# EAGLE board HECTOR-WATCH v31 (EAGLE 9.7.0)
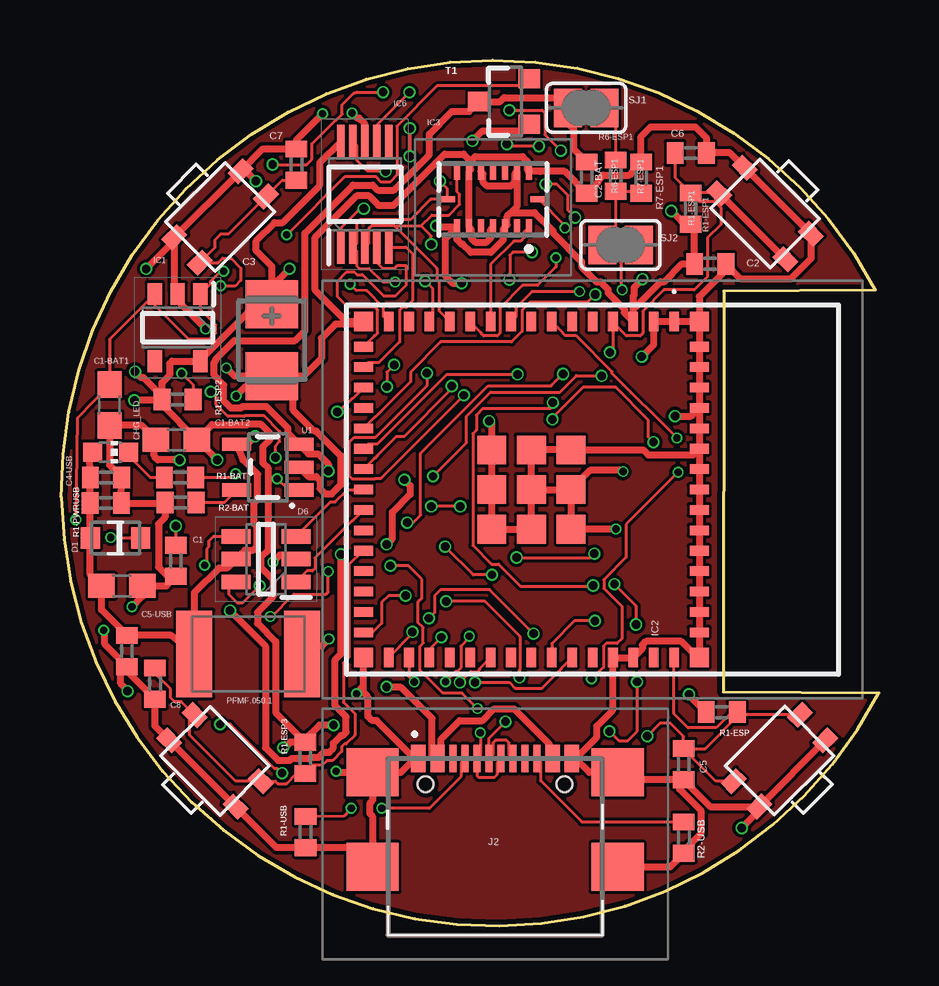
[diagram p0: board, top side]
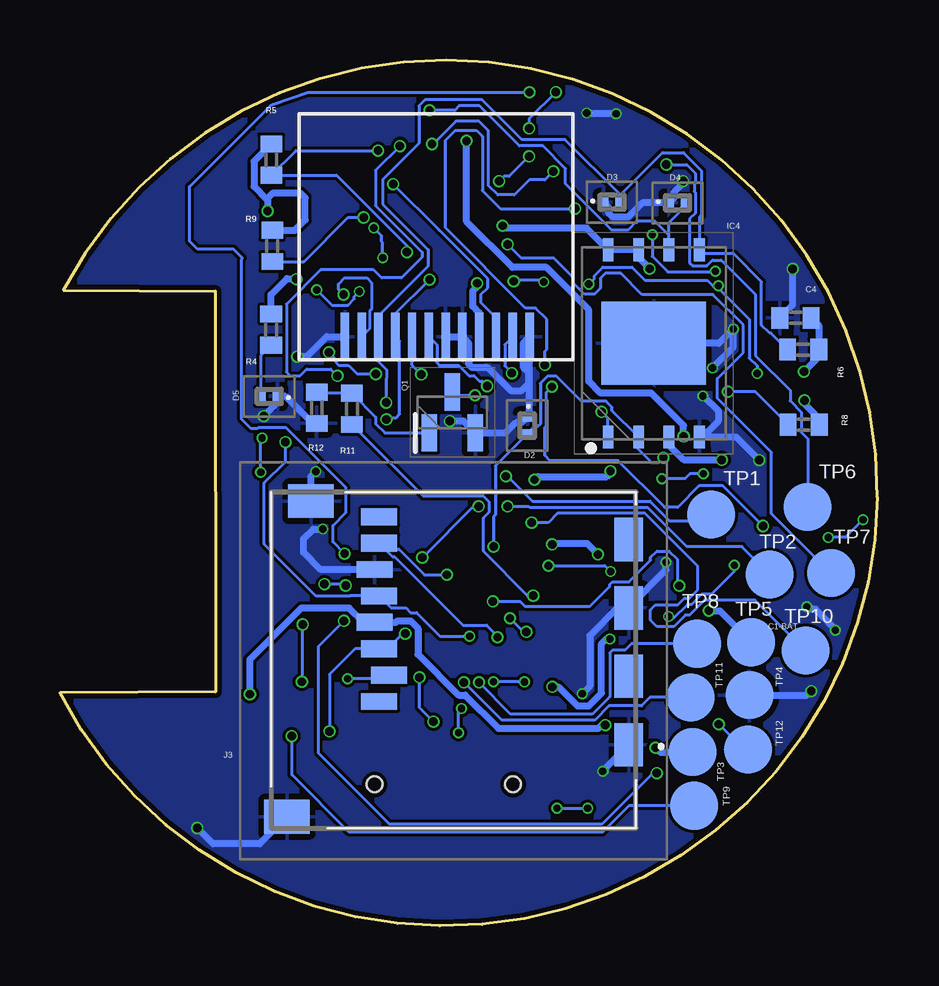
[diagram p1: board, bottom side, seen from below]

Size 34.08 x 36.08 mm. Coordinates in mm from the lower left corner, seen from the top.
Outline: 0,17.87 arc152 34.08,9.71 27.59,9.76 27.61,26.46 33.94,26.5 arc153 0,17.87
Copper layers (1*16): Top / Bottom
Stack-up Default Layer Stack: Top User Defined 0.035mm / Dielectric-1 User Defined 1.6mm / Bottom User Defined 0.035mm
Design rules: minimum copper width 5mil, minimum drill size 0.3mm, copper clearance wire_polygon to wire_polygon 5mil, copper clearance wire_polygon to pad_smd 5mil, copper clearance wire_polygon to via 5mil, copper clearance pad_smd to pad_smd 5mil, copper clearance pad_smd to via 5mil, copper clearance via to via 5mil, copper clearance smd to pad (same net) 5mil, copper clearance smd to via (same net) 5mil, copper clearance smd to smd (same net) 5mil, dimension clearance 0.2mm, restrict clearance 0mil, drill distance 6mil, keepout clearance 0mil

## Footprints (pad centres in the part's own frame; a part is rotated, then mirrored left to right if it is on the bottom)
EAGLE-LTSPICE_C0402 = smd 0.7 x 0.9: 1 -0.65,0; 2 0.65,0
RCL_C0603 = smd 1.1 x 1: 1 -0.85,0; 2 0.85,0
CT3528 = smd 2 x 2.2: + -1.5,0; - 1.5,0
ADAFRUIT_CHIP-LED0603 = smd 0.8 x 0.8: A 0,-0.75; C 0,0.75
AVX---SD0805S020S1R0_AVX_SD0805S020S1R0_0 = smd 0.8 x 0.9: 1 -1.05,0; 2 1.05,0
PESD5V0S1BL315 = smd 0.4 x 0.7: 1 -0.35,0; 2 0.35,0
SOT95P280X145-6N = smd 1.2 x 0.6: 1 -1.25,0.95; 2 -1.25,0; 3 -1.25,-0.95; 4 1.25,-0.95; 5 1.25,0; 6 1.25,0.95
SOT95P280X120-5N = smd 0.9 x 0.6: 1 -1.4,0.95; 2 -1.4,0; 3 -1.4,-0.95; 4 1.4,-0.95; 5 1.4,0.95
ESP32S3MINI1N8 = smd 0.8 x 0.4: 1 -7,5.95; 2 -7,5.1; 3 -7,4.25; 4 -7,3.4; 5 -7,2.55; 6 -7,1.7; 7 -7,0.85; 8 -7,0; 9 -7,-0.85; 10 -7,-1.7; 11 -7,-2.55; 12 -7,-3.4; 13 -7,-4.25; 14 -7,-5.1; 15 -7,-5.95; 31 7,-5.95; 32 7,-5.1; 33 7,-4.25; 34 7,-3.4; 35 7,-2.55; 36 7,-1.7; 37 7,-0.85; 38 7,0; 39 7,0.85; 40 7,1.7; 41 7,2.55; 42 7,3.4; 43 7,4.25; 44 7,5.1; 45 7,5.95 | smd 0.4 x 0.8: 16 -5.95,-7; 17 -5.1,-7; 18 -4.25,-7; 19 -3.4,-7; 20 -2.55,-7; 21 -1.7,-7; 22 -0.85,-7; 23 0,-7; 24 0.85,-7; 25 1.7,-7; 26 2.55,-7; 27 3.4,-7; 28 4.25,-7; 29 5.1,-7; 30 5.95,-7; 46 5.95,7; 47 5.1,7; 48 4.25,7; 49 3.4,7; 50 2.55,7; 51 1.7,7; 52 0.85,7; 53 0,7; 54 -0.85,7; 55 -1.7,7; 56 -2.55,7; 57 -3.4,7; 58 -4.25,7; 59 -5.1,7; 60 -5.95,7 | smd 1.2 x 1.2: 61 0,0; 66 -1.65,1.65; 67 -1.65,0; 68 -1.65,-1.65; 69 0,-1.65; 70 1.65,-1.65; 71 1.65,0; 72 1.65,1.65; 73 0,1.65 | smd 0.8 x 0.8: 62 -7,7; 63 -7,-7; 64 7,-7; 65 7,7
BMI085 = smd 0.675 x 0.25: 1 1.165,1.5; 2 1.165,1; 3 1.165,0.5; 4 1.165,0; 5 1.165,-0.5; 6 1.165,-1; 7 1.165,-1.5; 9 -1.165,-1.5; 10 -1.165,-1; 11 -1.165,-0.5; 12 -1.165,0; 13 -1.165,0.5; 14 -1.165,1; 15 -1.165,1.5 | smd 0.25 x 0.675: 8 0,-1.915; 16 0,1.915
SON127P800X600X80-9N = smd 0.95 x 0.45: 1 -3.9,1.905; 2 -3.9,0.635; 3 -3.9,-0.635; 4 -3.9,-1.905; 5 3.9,-1.905; 6 3.9,-0.635; 7 3.9,0.635; 8 3.9,1.905 | smd 3.45 x 4.35: 9 0,0
SOP50P490X110-10N = smd 1.4 x 0.3: 1 -2.2,1; 2 -2.2,0.5; 3 -2.2,0; 4 -2.2,-0.5; 5 -2.2,-1; 6 2.2,-1; 7 2.2,-0.5; 8 2.2,0; 9 2.2,0.5; 10 2.2,1
USB4110GFA = smd 0.3 x 1.15: A1 -3.35,3.678; A4 -2.55,3.678; A5 -1.25,3.678; A6 -0.25,3.678; A7 0.25,3.678; A8 1.25,3.678; A9 2.55,3.678; A12 3.35,3.678; B1 3.05,3.678; B4 2.25,3.678; B5 1.75,3.678; B6 0.75,3.678; B7 -0.75,3.678; B8 -1.75,3.678; B9 -2.25,3.678; B12 -3.05,3.678 | smd 2.18 x 2: MP1 -5.11,-0.827; MP2 5.11,-0.827; MP3 -5.11,3.103; MP4 5.11,3.103 | hole 0.65: -2.89,2.603; 2.89,2.603
112ATAARR03ATTEND = smd 1.8 x 1.2: G1 10.6,10.4; G2 4.9,10.4; S1 7.75,10.4; S2 2.05,10.4 | smd 1.4 x 1.9: G3 13.6,-3.85; G4 0.45,-2.85 | smd 0.7 x 1.5: P1 8.8,0; P2 7.7,0.4; P3 6.6,0; P4 5.5,-0.2; P5 4.4,0; P6 3.3,-0.2; P7 2.2,0; P8 1.1,0
VARISTOR_CT/CN1812 = smd 1.5 x 3.6: 1 -2.25,0; 2 2.25,0
SOT96P240X120-3N = smd 1.55 x 0.65: 1 -0.85,0.96; 2 -0.85,-0.96; 3 0.85,0
EAGLE-LTSPICE_R0402 = smd 0.7 x 0.9: 1 -0.65,0; 2 0.65,0
SJ = smd 1.168 x 1.6: 1 -0.762,0; 2 0.762,0
SPARKFUN-DISCRETESEMI_SOT23-3 = smd 0.8 x 0.9: 1 -0.95,-1; 2 0.95,-1; 3 0,1.1
TP20R = smd 2 x 2: TP 0,0
SPARKFUN-IC-POWER_SOT23-5 = smd 0.55 x 1.2: 1 -0.95,-1.3; 2 0,-1.3; 3 0.95,-1.3; 4 0.95,1.3; 5 -0.95,1.3
HECTOR-WATCH-BUTTON-FP = smd 0.9 x 0.635: 1 -1.95,0.75; 1' 1.95,0.75; 2 -1.95,-0.75; 2' 1.95,-0.75
HECTOR-WATCH-LCD-FP = smd 0.35 x 2: 1 3.9,-4.3; 2 3.2,-4.3; 3 2.5,-4.3; 4 1.8,-4.3; 5 1.1,-4.3; 6 0.4,-4.3; 7 -0.3,-4.3; 8 -1,-4.3; 9 -1.7,-4.3; 10 -2.4,-4.3; 11 -3.1,-4.3; 12 -3.8,-4.3

## Placement (x,y rotation side)
C1  1uF  [EAGLE-LTSPICE_C0402]  4.77,15.22 90 top
C1-BAT  4.7uF  [EAGLE-LTSPICE_C0402]  2.73,11.46 270 top
C1-BAT1  4.7uF  [RCL_C0603]  2,21.71 270 top
C1-BAT2  4.7uF  [RCL_C0603]  4.8,20.26 180 top
C2  1uF  [EAGLE-LTSPICE_C0402]  27.04,27.59 180 top
C2-BAT  4.7uF  [EAGLE-LTSPICE_C0402]  21.9,31.19 270 top
C3  100uF  [CT3528]  8.78,24.41 270 top
C4  100nF  [EAGLE-LTSPICE_C0402]  3.42,25.34 180 bottom
C4-USB  100nF  [EAGLE-LTSPICE_C0402]  1.86,18.69 0 top
C5  1uF  [EAGLE-LTSPICE_C0402]  25.94,6.74 270 top
C5-USB  4.7uF  [RCL_C0603]  2.52,14.17 0 top
C6  100nF  [EAGLE-LTSPICE_C0402]  26.24,32.21 0 top
C7  100nF  [EAGLE-LTSPICE_C0402]  9.8,31.73 90 top
C8  100nF  [EAGLE-LTSPICE_C0402]  3.91,10.1 270 top
CHG_LED  [ADAFRUIT_CHIP-LED0603]  2.05,19.74 270 top
D1  AVX---SD0805S020S1R0_AVX_SD0805S020S1R0AVX_SD0805S020S1R0_0_0  [AVX---SD0805S020S1R0_AVX_SD0805S020S1R0_0]  2.26,16.17 180 top
D2  PESD3V3S1BLYL  [PESD5V0S1BL315]  14.6,20.85 270 bottom
D3  PESD3V3S1BLYL  [PESD5V0S1BL315]  11.07,30.16 0 bottom
D4  PESD3V3S1BLYL  [PESD5V0S1BL315]  8.34,30.13 0 bottom
D5  PESD3V3S1BLYL  [PESD5V0S1BL315]  25.36,22.06 180 bottom
D6  USBLC6-2SC6Y  [SOT95P280X145-6N]  8.53,15.28 180 top
IC1  XC6220A331MR-G  [SOT95P280X120-5N]  4.85,24.93 270 top
IC2  ESP32-S3-MINI-1-N8  [ESP32S3MINI1N8]  19.59,18.18 270 top
IC3  BMI085  [BMI085]  17.99,30.27 270 top
IC4  W25Q256JVEIQ  [SON127P800X600X80-9N]  9.32,24.28 90 bottom
IC6  DRV2605LDGST  [SOP50P490X110-10N]  12.65,30.48 90 top
J2  USB4110-GF-A  [USB4110GFA]  18.08,3.29 0 top
J3  112A-TAAR-R03_ATTEND  [112ATAARR03ATTEND]  20.77,18.15 270 bottom
PFMF.050.1  500mA  [VARISTOR_CT/CN1812]  7.79,11.34 180 top
Q1  2N7002  [SOT96P240X120-3N]  17.72,21.4 90 bottom
R1-BAT  200  [EAGLE-LTSPICE_R0402]  4.95,18.69 0 top
R1-ESP  10K  [EAGLE-LTSPICE_R0402]  27.52,8.91 180 top
R1-ESP1  10K  [EAGLE-LTSPICE_R0402]  26.23,29.89 270 top
R1-ESP2  10K  [EAGLE-LTSPICE_R0402]  4.84,21.93 180 top
R1-ESP3  10K  [EAGLE-LTSPICE_R0402]  10.16,7.01 90 top
R1-PWRUSB  100K  [EAGLE-LTSPICE_R0402]  1.85,17.62 180 top
R1-USB  5K1  [EAGLE-LTSPICE_R0402]  10.18,3.91 90 top
R2-BAT  2K  [EAGLE-LTSPICE_R0402]  4.97,17.65 0 top
R2-USB  5K1  [EAGLE-LTSPICE_R0402]  25.94,3.68 270 top
R4  10K  [EAGLE-LTSPICE_R0402]  25.28,24.85 270 bottom
R5  10K  [EAGLE-LTSPICE_R0402]  25.27,31.93 270 bottom
R6  10K  [EAGLE-LTSPICE_R0402]  3.1,24.01 180 bottom
R6-ESP1  100K  [EAGLE-LTSPICE_R0402]  23.1,31.27 270 top
R7-ESP1  100K  [EAGLE-LTSPICE_R0402]  24.16,31.18 90 top
R8  10K  [EAGLE-LTSPICE_R0402]  3.07,20.89 180 bottom
R9  22  [EAGLE-LTSPICE_R0402]  25.23,28.33 270 bottom
R11  10K  [EAGLE-LTSPICE_R0402]  21.91,21.54 270 bottom
R12  10K  [EAGLE-LTSPICE_R0402]  23.38,21.59 90 bottom
SJ1  [SJ]  21.87,34.09 180 top
SJ2  [SJ]  23.31,28.38 180 top
T1  4.2A/20V/52mΩ/1.4W  [SPARKFUN-DISCRETESEMI_SOT23-3]  18.51,34.35 90 top
TP1  TPTP20R  [TP20R]  6.94,17.15 0 bottom
TP2  TPTP20R  [TP20R]  4.49,14.64 0 bottom
TP3  TPTP20R  [TP20R]  7.71,7.24 0 bottom
TP4  TPTP20R  [TP20R]  5.34,9.62 0 bottom
TP5  TPTP20R  [TP20R]  5.26,11.82 0 bottom
TP6  TPTP20R  [TP20R]  2.91,17.47 0 bottom
TP7  TPTP20R  [TP20R]  1.94,14.7 0 bottom
TP8  TPTP20R  [TP20R]  7.52,11.76 0 bottom
TP9  TPTP20R  [TP20R]  7.65,5.01 0 bottom
TP10  TPTP20R  [TP20R]  3,11.47 270 bottom
TP11  TPTP20R  [TP20R]  7.78,9.52 0 bottom
TP12  TPTP20R  [TP20R]  5.4,7.35 0 bottom
U1  SPARKFUN-IC-POWER_MCP73831  [SPARKFUN-IC-POWER_SOT23-5]  8.6,19.12 90 top
U$1  HECTOR-WATCH-BUTTON  [HECTOR-WATCH-BUTTON-FP]  6.61,29.55 225 top
U$2  HECTOR-WATCH-BUTTON  [HECTOR-WATCH-BUTTON-FP]  6.41,6.88 315 top
U$3  HECTOR-WATCH-BUTTON  [HECTOR-WATCH-BUTTON-FP]  29.94,6.89 45 top
U$4  HECTOR-WATCH-BUTTON  [HECTOR-WATCH-BUTTON-FP]  29.33,29.69 135 top
U$5  HECTOR-WATCH-LCD  [HECTOR-WATCH-LCD-FP]  18.4,28.85 0 bottom

## Library data of the parts
C1 C1-BAT C2 C2-BAT C4 C4-USB C5-C8 = Hector_Watch; SPICEMODEL: NONE; SPICEPREFIX: C
C1-BAT1 C1-BAT2 C3 C5-USB = Hector_Watch; SPICEPREFIX: C
CHG_LED PFMF.050.1 SJ1 SJ2 TP1-TP12 = Hector_Watch
D1 = Hector_Watch; CENTROID_NOT_SPECIFIED: No; DATASHEET: http://datasheets.avx.com/schottky.pdf; DIGIKEY_DESCRIPTION: DIODE SCHOTTKY 20V 1A 0805; DIGIKEY_PART_NUMBER: 478-7800-1-ND; LEAD_FREE: yes; MF: AVX; MOUSER_PART_NUMBER: 581-SD0805S020S1R0; MPN: SD0805S020S1R0; PACKAGE: 0805 (2012 metric); PREFIX: D; ROHS: yes; TEMPERATURE_RANGE_HIGH: +125°C; TEMPERATURE_RANGE_LOW: -55°C
D2-D5 = Hector_Watch; ARROW_PART_NUMBER: PESD3V3S1BLYL; ARROW_PRICE-STOCK: https://www.arrow.com/en/products/pesd3v3s1blyl/nexperia?region=nac; DESCRIPTION: PESD3V3S1BL - Low capacitance bidirectional ESD protection diode; HEIGHT: 0mm; MANUFACTURER_NAME: Nexperia; MANUFACTURER_PART_NUMBER: PESD3V3S1BLYL; MOUSER_PART_NUMBER: 771-PESD3V3S1BLYL; MOUSER_PRICE-STOCK: https://www.mouser.co.uk/ProductDetail/Nexperia/PESD3V3S1BLYL?qs=vLWxofP3U2zWoKHYJMVoKQ%3D%3D
D6 = Hector_Watch; ARROW_PART_NUMBER: USBLC6-2SC6Y; ARROW_PRICE-STOCK: https://www.arrow.com/en/products/usblc6-2sc6y/stmicroelectronics?region=nac; DESCRIPTION: Low Cap. ESD Protection Auto SOT-23-6 STMicroelectronics USBLC6-2SC6Y, Dual Uni-Directional TVS Diode Array, 6-Pin SOT-23; HEIGHT: 1.45mm; MANUFACTURER_NAME: STMicroelectronics; MANUFACTURER_PART_NUMBER: USBLC6-2SC6Y; MOUSER_PART_NUMBER: 511-USBLC6-2SC6Y; MOUSER_PRICE-STOCK: https://www.mouser.co.uk/ProductDetail/STMicroelectronics/USBLC6-2SC6Y?qs=gNDSiZmRJS%2FOgDexvXkdow%3D%3D
IC1 = Hector_Watch; DESCRIPTION: LDO Voltage Regulators; HEIGHT: 1.2mm; MANUFACTURER_NAME: Torex; MANUFACTURER_PART_NUMBER: XC6220A331MR-G; MOUSER_PART_NUMBER: 865-XC6220A331MR-G; MOUSER_PRICE-STOCK: https://www.mouser.co.uk/ProductDetail/Torex-Semiconductor/XC6220A331MR-G?qs=AsjdqWjXhJ8ZSWznL1J0gg%3D%3D
IC2 = Hector_Watch; DESCRIPTION: WiFi Development Tools - 802.11 [Engineering Samples] SMD Module, ESP32-S3FN8, 8 MB SPI Flash, PCB Antenna; HEIGHT: 2.55mm; MANUFACTURER_NAME: Espressif Systems; MANUFACTURER_PART_NUMBER: ESP32-S3-MINI-1-N8; MOUSER_PART_NUMBER: 356-ESP32-S3-MINI1N8; MOUSER_PRICE-STOCK: https://www.mouser.co.uk/ProductDetail/Espressif-Systems/ESP32-S3-MINI-1-N8?qs=XAiT9M5g4x82rl6F%2FIYUQg%3D%3D
IC3 = Hector_Watch; ARROW_PART_NUMBER: BMI085; ARROW_PRICE-STOCK: https://www.arrow.com/en/products/bmi085/bosch; DESCRIPTION: IMUs - Inertial Measurement Units High-performance IMU BMI085 for virtual and augmented reality applications; HEIGHT: 1mm; MANUFACTURER_NAME: BOSCH; MANUFACTURER_PART_NUMBER: BMI085; MOUSER_PART_NUMBER: 262-BMI085; MOUSER_PRICE-STOCK: https://www.mouser.co.uk/ProductDetail/Bosch-Sensortec/BMI085?qs=y6ZabgHbY%252ByGCM8LfWZyqA%3D%3D
IC4 = Hector_Watch; ARROW_PART_NUMBER: W25Q256JVEIQ; ARROW_PRICE-STOCK: https://www.arrow.com/en/products/w25q256jveiq/winbond-electronics?region=nac; DESCRIPTION: 256M-bit Serial Flash Memory with uniform 4KB sectors and Dual/Quad SPI; HEIGHT: 0.8mm; MANUFACTURER_NAME: Winbond; MANUFACTURER_PART_NUMBER: W25Q256JVEIQ; MOUSER_PART_NUMBER: 454-W25Q256JVEIQ; MOUSER_PRICE-STOCK: https://www.mouser.co.uk/ProductDetail/Winbond/W25Q256JVEIQ?qs=qSfuJ%252Bfl%2Fd4o%2FNFUf7yCgA%3D%3D
IC6 = Hector_Watch; ARROW_PART_NUMBER: DRV2605LDGST; ARROW_PRICE-STOCK: https://www.arrow.com/en/products/drv2605ldgst/texas-instruments?region=nac; DESCRIPTION: ERM & LRA Device Haptic Driver 2-5V BGA9 Texas Instruments DRV2605LDGST Piezo Haptic Motor Driver IC, 5 V, 10-Pin VSSOP; HEIGHT: 1.1mm; MANUFACTURER_NAME: Texas Instruments; MANUFACTURER_PART_NUMBER: DRV2605LDGST; MOUSER_PART_NUMBER: 595-DRV2605LDGST; MOUSER_PRICE-STOCK: https://www.mouser.co.uk/ProductDetail/Texas-Instruments/DRV2605LDGST?qs=asCBFxFfL1TjvcNdZsR2BA%3D%3D
J2 = Hector_Watch; DESCRIPTION: CONN USB 2.0 TYPE-C R/A SMT; HEIGHT: 3.26mm; MANUFACTURER_NAME: GCT (GLOBAL CONNECTOR TECHNOLOGY); MANUFACTURER_PART_NUMBER: USB4110-GF-A; MOUSER_PART_NUMBER: 640-USB4110-GF-A; MOUSER_PRICE-STOCK: https://www.mouser.co.uk/ProductDetail/GCT/USB4110-GF-A?qs=KUoIvG%2F9IlYiZvIXQjyJeA%3D%3D
J3 = Hector_Watch; DESCRIPTION: Micro SD Card Socket, Push-Push Type, Top Mount, SMT, H=1.83mm, 10u; HEIGHT: 1.9mm; MANUFACTURER_NAME: ATTEND; MANUFACTURER_PART_NUMBER: 112A-TAAR-R03 ATTEND
Q1 = Hector_Watch; ARROW_PART_NUMBER: 2N7002; ARROW_PRICE-STOCK: https://www.arrow.com/en/products/2n7002/on-semiconductor?region=europe; DESCRIPTION: N-channel MOSFET,2N7002 0.115A 60V; HEIGHT: 1.2mm; MANUFACTURER_NAME: onsemi; MANUFACTURER_PART_NUMBER: 2N7002; MOUSER_PART_NUMBER: 512-2N7002; MOUSER_PRICE-STOCK: https://www.mouser.co.uk/ProductDetail/onsemi-Fairchild/2N7002?qs=0dwsXDNhqlz66WJJhrTFjQ%3D%3D
R1-BAT R1-ESP R1-ESP1-R1-ESP3 R1-PWRUSB R1-USB R2-BAT R2-USB R4-R6 R6-ESP1 R7-ESP1 R8 R9 R11 R12 = Hector_Watch; SPICEMODEL: NONE; SPICEPREFIX: R
T1 = Hector_Watch; PROD_ID: TRANS-14715
U1 = Hector_Watch; PROD_ID: IC-09995
U$1-U$5 = HECTOR-WATCH-EXTRAS

## Nets
3V3: C1-BAT2.1 C2.2 C3.+ C4.1 IC1.5 IC2.3 IC3.3 IC3.7 IC3.11 IC3.14 IC4.3 IC4.7 IC4.8 IC6.10 J3.P4 R1-ESP1.2 R1-ESP2.2 R1-ESP3.2 R1-ESP.2 R4.1 R5.1 R6.1 R8.1 R9.1 TP3.TP U$5.4
ADC_BAT: IC2.9 SJ2.1
BOOT: C6.1 IC2.4 R1-ESP1.1 TP10.TP U$4.1 U$4.1'
BUTTON1: C7.1 IC2.15 R1-ESP2.1 U$1.1 U$1.1'
BUTTON2: C8.1 IC2.26 R1-ESP3.1 U$2.1 U$2.1'
D+: D6.1 IC2.24
D-: D6.3 IC2.23
DISP_RST: IC2.20 U$5.11
DN: D6.4 J2.A7 J2.B7
DP: D6.6 J2.A6 J2.B6
EN_DRV: IC2.17 IC6.5
GND: C1-BAT1.2 C1-BAT2.2 C1-BAT.2 C1.1 C2-BAT.2 C2.1 C3.- C4-USB.2 C4.2 C5-USB.2 C5.2 C6.2 C7.2 C8.2 D2.1 D3.1 D4.1 D5.1 D6.2 IC1.2 IC2.1 IC2.2 IC2.42 IC2.43 IC2.46 IC2.47 IC2.48 IC2.49 IC2.50 IC2.51 IC2.52 IC2.53 IC2.54 IC2.55 IC2.56 IC2.57 IC2.58 IC2.59 IC2.60 IC2.61 IC2.62 IC2.63 IC2.64 IC2.65 IC2.66 IC2.67 IC2.68 IC2.69 IC2.70 IC2.71 IC2.72 IC2.73 IC3.4 IC3.6 IC3.10 IC3.15 IC4.4 IC4.9 IC6.8 J2.A1 J2.A12 J2.B1 J2.B12 J2.MP1 J2.MP2 J2.MP3 J2.MP4 J3.G1 J3.G2 J3.G3 J3.G4 J3.P6 Q1.2 R1-PWRUSB.1 R1-USB.1 R2-BAT.1 R2-USB.2 R7-ESP1.2 R12.1 TP4.TP U1.2 U$1.2 U$1.2' U$2.2 U$2.2' U$3.2 U$3.2' U$4.2 U$4.2' U$5.1 U$5.5 U$5.6 U$5.12
IMU_INT1: IC2.11 IC3.16
IMU_INT2: IC2.10 IC3.1
IN_DRV: IC2.16 IC6.4
LEDA: R9.2 U$5.3
LEDK: Q1.3 U$5.2
MISO: D2.2 IC2.33 IC4.2 J3.P7 R8.2
MOSI: D3.2 IC2.31 IC4.5 J3.P3 R6.2 U$5.10
N$1: C1.2 IC6.1
N$2: Q1.1 R11.1 R12.2
N$3: J2.A5 R1-USB.2
N$4: C1-BAT1.1 D1.1 IC1.1 IC1.3 T1.2
N$5: R2-BAT.2 U1.5
N$6: CHG_LED.C R1-BAT.1
N$7: R1-BAT.2 U1.1
N$8: R6-ESP1.1 SJ1.1
N$9: R6-ESP1.2 R7-ESP1.1 SJ2.2
N$14: J2.B5 R2-USB.1
PIN_LED: IC2.30 R11.2
PPG_INT: IC2.36 TP8.TP
RESET: C5.1 IC2.45 R1-ESP.1 TP9.TP U$3.1 U$3.1'
RX: IC2.40 TP11.TP
SCK: D4.2 IC2.32 IC4.6 J3.P5 R5.2 U$5.9
SCL: IC2.13 IC3.8 IC6.2 TP6.TP
SDA: IC2.12 IC3.9 IC6.3 TP7.TP
SS: D5.2 R4.2
SS_FLASH: IC2.18 IC4.1
SS_SD: IC2.7 J3.P2
SS_TFT: IC2.21 U$5.8
TFT_DC: IC2.22 U$5.7
TX: IC2.39 TP12.TP
VBAT: C2-BAT.1 SJ1.2 T1.3 TP5.TP U1.3
VBUS: C1-BAT.1 C4-USB.1 C5-USB.1 CHG_LED.A D1.2 D6.5 PFMF.050.1.2 R1-PWRUSB.2 T1.1 U1.4
VIBE_OUT+: IC6.9 TP1.TP
VIBE_OUT-: IC6.7 TP2.TP
VUSB: J2.A4 J2.A9 J2.B4 J2.B9 PFMF.050.1.1

## Tracks (layer width: path | path; a pad name or v marks a point on that pad's centre or on a via)
3V3  (via drill 0.35)
  Top 0.3: R1-ESP2.2 4.19,22.63 4.51,22.95 4.51,23.43 4.61,23.53 IC1.5 5.96,23.7 5.96,23.75 8.12,25.91 C3.+ | IC2.3 23.84,25.7 24.98,26.85 25.13,26.85 25.88,27.59 C2.2 26.39,29.08 | IC2.3 23.47,25.56 23.47,25.7 22.79,26.38 22.79,26.53 22.48,26.84 22.31,26.84 21.68,27.46 21.68,27.69 20.49,28.88 20.49,28.96 19.73,29.72 18.75,29.72 | 26.39,29.08 R1-ESP1.2 | IC3.11 17.58,31.34 17.58,30.99 17.75,30.83 18.73,30.83 18.89,30.99 18.89,31.34 IC3.14 18.99,29.96 18.75,29.72 | 18.75,29.72 18.58,29.56 18.58,29.21 IC3.3 18.41,29.04 18.41,28.58 17.9,28.07 17.07,28.07 16.73,28.41 16.68,28.41 16.49,28.6 IC3.7 | C3.+ 8.78,27.48 8.12,28.13 8.12,28.54 8.88,29.3 9.22,29.3 10.78,30.87 10.78,31.81 IC6.10 | R1-ESP.2 26.16,9.62 v26.16,9.65 | v25.42,29.79 26.14,29.08 26.39,29.08 | v3.07,23.1 3.32,22.85 3.42,22.85 4.19,22.08 R1-ESP2.2 | R1-ESP3.2 9.54,7.66 9.31,7.43 v9.25,7.43 | IC3.7 15.99,28.61 15.99,27.1 16.3,26.79 v16.69,26.79 v16.69,26.78 | R1-ESP2.2 4.16,21.9 v3.04,21.9 | v6.49,19.42 C1-BAT2.1 | R1-ESP3.2 8.93,8.89 8.93,11.84 8.17,12.6 8.17,13.07 8.82,13.72 8.82,14.43 8.31,14.94 8.31,15.37 8.61,15.66 8.61,19.09 8.4,19.3 8.4,19.96 8.67,20.23 8.67,20.55 8.3,20.92 7.79,20.92 7.76,20.89 6.28,20.89 C1-BAT2.1 | v11.35,8.37 10.75,8.37 10.16,7.78 R1-ESP3.2 | C1-BAT2.1 4.19,21.71 R1-ESP2.2 | IC3.7 15.69,29.11 v15.62,29.17 | IC2.3 23.84,26.26 23.88,26.29 23.88,26.61 v24.22,26.95 | v9.5,27.38 8.78,26.66 C3.+
  Bottom 0.3: R4.1 25.28,26.31 24.62,26.97 24.24,26.97 v24.22,26.95 | 25.42,30.32 v25.42,29.79 | R5.1 26,31.85 26,30.82 25.46,30.28 25.42,30.32 | C4.1 2.45,25.02 R6.1 2.45,23.72 v3.07,23.1 | v3.04,21.9 3.04,21.76 2.42,21.14 R8.1 | IC4.3 8.69,20.03 8.09,19.43 v6.51,19.43 v6.49,19.42 | v9.25,7.43 9.06,7.24 TP3.TP | v15.62,29.17 15.53,29.08 12.13,29.08 IC4.8 IC4.7 9.96,27.87 9.5,27.41 v9.5,27.38 | U$5.4 16.6,25.56 16.86,25.82 16.86,26.47 16.69,26.64 v16.69,26.78 | R9.1 24.3,28.98 23.86,29.42 23.86,30.34 24.04,30.53 25.22,30.53 25.42,30.32 | v11.35,8.37 11.51,8.37 11.64,8.23 15.8,8.23 17.19,9.62 17.46,9.62 19.16,11.32 19.16,12.4 19.46,12.71 20.02,12.71 20.08,12.65 J3.P4 21.43,12.65 22.02,13.24 24.03,13.24 26.16,11.1 v26.16,9.65
ADC_BAT  (via drill 0.3)
  Top 0.13: SJ2.1 23.32,27.63 23.32,26.56 v23.38,26.5 | IC2.9 18.94,25.39 18.94,25.77 19.61,26.44 21.43,26.44 21.43,26.43 v21.6,26.43
  Bottom 0.13: v21.6,26.43 21.82,26.22 21.82,26.13 22.07,25.87 22.74,25.87 v23.38,26.5
BOOT  (via drill 0.35)
  Top 0.127: IC2.4 22.99,24.02 v22.87,23.9 | v14.41,16.81 14.67,16.81 14.98,17.12 14.98,19.69 17.79,22.5 20.41,22.5 v20.91,23
  Top 0.13: R1-ESP1.1 27.41,30.54 U$4.1' | R1-ESP1.1 25.59,31.19 C6.1 | IC2.4 22.99,25.16 23.56,24.59 24.12,24.59 24.23,24.7 24.23,25.61 25.12,26.5 26.38,26.5 26.94,27.06 26.94,28.67 27.48,29.21 27.48,29.93 27.22,30.19 26.58,30.19 R1-ESP1.1
  Top 0.3: U$4.1' U$4.1
  Bottom 0.127: v14.41,16.81 13.72,16.81 13.33,17.19 9.69,17.19 7.5,15 7.5,14.01 7.85,13.66 8.05,13.66 8.34,13.37 8.35,13.38 9.26,13.38 9.46,13.18 9.46,12.74 9.19,12.48 8.49,12.48 8.01,12.95 7.84,12.95 7.21,13.58 5.11,13.58 4.98,13.45 | v20.91,23 21.69,23 22.06,23.36 22.46,23.36 22.57,23.47 22.57,23.6 v22.87,23.9 | TP10.TP 4.98,13.45 | 4.98,13.45
BUTTON1  (via drill 0.3)
  Top 0.127: v5.01,23.02 5.49,22.54 R1-ESP2.1 | U$1.1 9.21,31.08 | U$1.1 | U$1.1 6.96,28.83 | 6.96,28.83 | 6.39,28.26 | 6.39,28.26 U$1.1' 6.53,27.64 6.72,27.83 7.07,27.83 7.48,27.41 7.48,26.9 7.23,26.66 6.66,26.66 v6.64,26.68 | v12.03,26.75 v12.03,26.74 12.29,26.48 12.74,26.47 13.44,25.77 13.44,25.39 IC2.15
  Top 0.13: 9.21,31.08 C7.1 | 6.96,28.83 6.63,28.83 6.39,28.58 6.39,28.26
  Bottom 0.127: v5.01,23.02 5.01,23.34 5.34,23.66 5.34,25.29 6.69,26.63 | 6.69,26.63 v6.64,26.68 | v12.03,26.75 11.8,26.98 11.8,27.09 11.45,27.45 10.23,27.45 9.68,26.9 7.09,26.9 6.82,26.63 6.69,26.63
BUTTON2
  Top 0.127: C8.1 3.91,10.52 4.55,9.88 4.55,9.51 4.71,9.35 5,9.35 U$2.1 5.35,8.58 5.35,7.95 7.27,6.03 U$2.1' 8.91,6.03 9.02,5.93 9.38,5.93 9.81,6.36 R1-ESP3.1
  Top 0.13: R1-ESP3.1 10.5,6.69 10.87,6.69 11.07,6.89 11.3,6.89 11.69,7.27 11.69,7.48 11.8,7.59 11.87,7.59 12.23,7.95 12.23,8.84 11.76,9.32 11.76,10.96 12,11.2 12,15.06 12.57,15.63 IC2.26
D+
  Top 0.127: D6.1 10.24,14.79 10.46,14.79 10.57,14.9 10.57,15.33 12.11,16.87 12.13,16.87 IC2.24
D-
  Top 0.13: D6.3 11.21,17.67 11.41,17.67 11.93,18.18 IC2.23
DISP_RST  (via drill 0.35)
  Top 0.127: IC2.20 13.05,21.19 13.07,21.19 14.56,22.68 14.56,23.08 15.81,24.34 18.76,24.34 19.2,24.77 19.2,25.66 19.52,25.99 21.93,25.99 v22.26,26.31
  Bottom 0.127: v22.26,26.31 22.47,26.52 22.47,26.75 22.22,27 21.29,27 21.09,26.81 21.09,25.71 21.17,25.63 21.17,24.89 U$5.11
DN  (via drill 0.3, 0.35)
  Top 0.127: J2.B7 17.49,7.13 17.49,8.03 v17.46,8.05 | v13.72,15.01 14.46,15.01 15.03,14.45 15.03,13.65 14.88,13.5 14.88,12.64 15.08,12.44 15.08,11.79 14.95,11.66 14.95,10.65 15.9,9.7 16.7,9.7 v17.34,9.06 | v8.71,12.89 8.75,12.89 9.69,13.83 11.03,13.83 11.12,13.92 v11.12,14.77
  Top 0.13: J2.A7 18.17,6.81 18.17,6.32 18.05,6.2 17.39,6.2 17.33,6.26 J2.B7 | D6.4 6.34,16.23 6.14,16.03 6.14,15.8 6.06,15.72 6.06,15.12 v5.97,15.03
  Bottom 0.127: v5.97,15.03 5.97,14.77 6.91,13.83 7.32,13.83 7.74,13.41 7.91,13.41 8.48,12.84 8.66,12.84 v8.71,12.89 | v17.46,8.05 17.46,8.94 v17.34,9.06 | v11.12,14.77 | v13.72,15.01 11.36,15.01 v11.12,14.77
DP  (via drill 0.35)
  Top 0.127: J2.B6 18.67,7.13 18.67,7.63 18.56,7.74 18.1,7.74 17.99,7.63 17.99,7.13 J2.A6 17.83,7.83 v18.51,8.51 | v19.09,10.36 19.09,10.67 19.13,10.71 19.13,12.05 17.66,13.52 v16.04,13.52 | D6.6 6.99,14.04 6.99,13.8 7.34,13.45 7.54,13.45 v8.26,14.18
  Bottom 0.127: v18.51,8.51 19.09,9.1 v19.09,10.36 | v16.04,13.52 14.89,13.52 14.7,13.33 11.98,13.33 11.16,14.15 11.16,14.23 11.05,14.34 10.36,14.34 9.46,15.24 9.46,15.35 9.19,15.62 8.68,15.62 8.34,15.27 8.34,14.25 v8.26,14.18
EN_DRV
  Top 0.127: IC6.5 14.36,28.28 14.64,28.01 14.64,26.04 14.41,25.82
  Top 0.13: 14.41,25.82 14.37,25.78 14.21,25.78 14.1,25.66 14.1,24.34 13.23,23.47 12.78,23.47 IC2.17
GND  (via drill 0.3, 0.35)
  Top 0.127: J2.A12 J2.B1 | J2.B12 J2.A1
  Top 0.3: C8.2 | C8.2 2.74,10.62 C1-BAT.2 | C1-BAT.2 1.81,11.74 1.81,12.28 v1.76,12.33 | v2.94,13.3 3.37,13.73 C5-USB.2 4.37,14.17 4.6,14.4 | 4.6,14.4 C1.1 | J2.MP2 25.38,2.47 R2-USB.2 25.94,3.14 26.67,3.87 26.67,4.8 25.78,5.69 25.78,6.09 | 25.78,6.09 C5.2 27.05,4.98 U$3.2 | 25.78,6.09 23.49,6.09 J2.MP4 22,6.4 J2.A12 22.32,7.86 22.32,8.33 22.99,9 IC2.42 IC2.43 24.21,11.56 24.21,11.7 24.38,11.86 25.86,11.86 26.53,11.18 IC2.65 IC2.46 IC2.47 IC2.48 IC2.49 IC2.50 IC2.51 IC2.52 IC2.53 IC2.54 IC2.55 | U$1.2' 7.4,31.39 | 7.4,31.39 7.63,31.62 | 4.6,14.4 4.05,14.96 4.05,16.76 4.32,17.03 R2-BAT.1 4.3,17.62 R1-PWRUSB.1 2.46,17.67 C4-USB.2 2,19.2 C1-BAT1.2 3.35,20.86 C1-BAT2.2 3.87,20.18 3.87,19.58 4.02,19.43 4.72,19.43 4.74,19.41 v4.93,19.41 | J2.MP3 14.15,6.4 J2.A1 13.15,8.55 12.96,8.55 12.78,8.73 12.78,9.54 12.59,9.73 12.59,10 | IC2.62 26.59,26.22 27.69,27.33 C2.1 28.33,26.96 30.39,26.96 31.24,27.81 U$4.2 U$4.2' 27.87,32.21 C6.2 26.89,32.85 26.44,33.29 24.57,33.29 24.16,32.89 R7-ESP1.2 23.83,31.5 23.83,31.45 23.67,31.29 22.59,31.29 22.38,31.08 22.38,31.02 C2-BAT.2 20.99,31.44 19.97,31.44 IC3.15 19.41,31.51 19.41,31.87 19.23,32.05 17.25,32.05 17.06,31.87 | IC2.62 IC2.1 IC2.2 24.69,24.22 v24.19,23.72 | IC2.62 IC2.60 IC2.59 IC2.58 IC2.57 | IC2.57 IC2.56 IC2.55 | IC2.61 IC2.71 IC2.70 IC2.69 IC2.68 17.94,20.92 v17.83,21.04 | IC2.61 IC2.67 IC2.66 24.26,19.83 24.46,19.63 26.34,19.63 IC2.55 | IC2.61 IC2.73 | IC2.73 IC2.72 23.09,16.53 23.1,16.54 v23.12,16.54 | J2.MP3 12.97,5.22 12.85,5.11 12.85,4.69 12.97,4.58 J2.MP1 12.17,3.26 R1-USB.1 8.96,3.26 U$2.2' U$2.2 3.9,8.32 C8.2
  Top 0.3: D6.2 9.61,15.45 9.1,15.45 v8.82,15.16 | 12.59,10 IC2.64 | IC2.73 22.04,18.98 23.37,18.98 v23.42,18.93 | v11.45,6.45 11.5,6.4 J2.MP3 | C7.2 | C7.2 9.8,32.75 v10.89,33.84 | IC6.8 12.65,33.43 12.41,33.66 12.34,33.66 v12.12,33.88 | U$1.2' 4.71,28.19 | 4.71,28.19 4.71,26.5 4.69,26.49 IC1.2 4.85,26.04 v6.01,24.88 | C7.2 8.39,32.38 U$1.2 7.63,31.62 | U$3.2' U$3.2 | 7.63,31.62 | 4.71,28.19 | 4.71,28.19 4.71,28.55 | IC3.4 17.89,29.01 17.89,28.66 17.73,28.5 17.25,28.5 17.08,28.66 17.08,29.01 IC3.6 IC3.10 17.06,31.51 17.06,31.87 | C3.- 10.1,22.91 10.84,23.66 10.84,24.5 11.42,25.08 12.49,25.08 IC2.63 11.88,25.18 10.58,26.49 10.58,28.69 12.33,30.44 12.8,30.44 13.22,30.03 13.84,30.03 15.97,32.16 16.76,32.16 17.06,31.87 | v25.58,21.25 26.25,21.25 IC2.57 | 7.4,31.39 7.76,31.39 v8.11,31.04 | v2.76,9.79 2.76,9.82 2.48,10.1 2.48,10.55 C1-BAT.2 | v28.36,4.08 29.09,4.81 U$3.2 | v3.53,27.38 4.71,28.55 | 4.71,28.55 U$1.2' | C3.- 9.66,22.03 9.66,21.49 10.54,20.62 10.62,20.62 11.66,19.58 11.66,18.4 11.27,18.01 10.99,18.01 10.78,18.22 10.78,18.56 10.62,18.72 10.3,18.72 U1.2 | C3.- 8.11,22.91 v7.28,22.08 | 12.59,10 12.31,9.72 v12.31,9.68 | C3.- 7.21,22.91 v6.88,23.25
  Bottom 0.3: U$5.6 U$5.5 17.06,24.3 17.06,23.44 16.89,23.28 16.26,23.28 15.29,22.3 14.85,22.3 14.54,22.61 14.54,23.05 14.75,23.26 14.75,24.3 U$5.1 14.5,21.3 D2.1 14.82,20.98 15.06,20.98 15.5,20.55 Q1.2 17.26,21.04 v17.83,21.04 | v2.94,13.3 2.84,13.2 2.58,13.2 1.84,12.46 1.84,12.4 v1.76,12.33 | v10.89,33.84 12.08,33.84 v12.11,33.88 v12.12,33.88 | J3.G4 23.62,18.73 v23.42,18.93 | J3.P6 23.21,14.85 23.92,15.57 23.92,16.12 23.51,16.54 v23.12,16.54 | R12.1 23.55,20.94 24.67,22.06 D5.1 25.01,21.82 v25.58,21.25 | J3.G1 11.45,6.47 v11.45,6.45 | D3.1 11.2,29.94 11.2,29.69 11.03,29.53 10.4,29.53 9.81,30.13 D4.1 8.47,30.35 8.47,30.59 8.11,30.95 v8.11,31.04 | TP4.TP 2.93,9.62 v2.76,9.79 | J3.G3 25.75,3.42 27.69,3.42 v28.36,4.08 | C4.2 3.53,25.87 v3.53,27.38 | v4.93,19.41 5.9,20.38 IC4.4 7.21,20.58 7.09,20.58 6.64,21.03 6.64,21.47 7.25,22.08 v7.27,22.08 v7.28,22.08 | U$5.12 22.96,24.55 23.78,23.73 24.19,23.73 v24.19,23.72 | IC4.9 6.61,24.28 v6.01,24.88 6.01,24.12 v6.88,23.25 | v8.82,15.16 8.82,14.83 10.37,13.28 J3.G2 10.84,13.25 11.99,12.1 11.99,10 v12.31,9.68
  pour Bottom: 27.6,9.72 27.6,26.57 33.94,26.57 arc62 18.15,36.04 17.8,36.04 arc90 0.23,18.41 0.2,17.92 arc90 18.3,0.02 arc63 34.09,9.72
IMU_INT1  (via drill 0.3)
  Top 0.13: IC2.11 17.5,24.73 17.5,24.7 17.61,24.59 18.17,24.59 18.28,24.7 18.28,25.75 19.23,26.69 19.85,26.69 20.62,27.46 v20.62,27.84 | v21,29.09 21,29.18 IC3.16
  Bottom 0.13: v20.62,27.84 20.62,28.45 20.67,28.5 20.67,28.76 v21,29.09
IMU_INT2
  Top 0.13: IC3.1 19.3,28.93 19.3,28.69 19.15,28.54 18.86,28.54 17.89,27.57 IC2.10
IN_DRV
  Top 0.127: IC6.4 13.15,27.64 13.4,27.39 13.88,27.39 13.99,27.51 14.38,27.51 14.38,26.71 13.94,26.27 13.42,26.27 12.55,27.14 12.31,27.14 12.2,27.25 11.89,27.25 11.5,26.86 11.5,26.22 11.95,25.77 13.07,25.77 13.18,25.66 13.18,24.71 13.07,24.59 13.05,24.59 IC2.16
LEDA  (via drill 0.35)
  Top 0.127: v20.19,30.91 20.65,30.91 21.12,30.44 21.12,29.81 v21.42,29.52
  Bottom 0.127: R9.2 23.91,27.68 22.07,29.52 v21.42,29.52 | U$5.3 15.9,25.34 16.52,25.96 16.52,26.32 16.25,26.6 16.25,26.97 18.26,28.98 18.26,28.99 v20.19,30.91
LEDK  (via drill 0.35)
  Top 0.127: v15.24,23.04 15.24,22.51 13.07,20.34 12.18,20.34 12,20.16 12,18.76 12.11,18.64 13.07,18.64 13.08,18.65 13.32,18.65 v16.78,22.11
  Bottom 0.127: U$5.2 15.54,24.22 15.54,23.34 v15.24,23.04 | Q1.3 17.59,22.11 v16.78,22.11
MISO  (via drill 0.35)
  Top 0.127: v15.84,12.03 15.34,11.53 IC2.33 | v16,15.81 17.17,14.63 v17.95,14.63 | v8.92,19.52 8.92,20.01 9.11,20.19 9.11,20.6 8.44,21.27 7.65,21.27 7.62,21.24 6.93,21.24 6.43,21.74 6.43,22.06 v6.23,22.26
  Bottom 0.127: v15.84,12.03 15.84,12.08 16.3,12.53 17.28,12.53 20.14,15.39 20.21,15.39 J3.P7 20.52,15.7 19.95,15.7 18.88,14.63 v17.95,14.63 | v16,15.81 16,17.07 15.93,17.14 15.93,19.17 D2.2 14.29,20.81 14.17,20.81 14.06,20.92 14.06,22.6 13.75,22.91 13.39,22.91 12.34,21.86 11.32,21.86 11.06,21.61 11.06,21.48 IC4.2 10.06,20.38 10.06,19.96 9.43,19.33 9.12,19.33 v8.92,19.52 | R8.2 5.1,22.26 v6.23,22.26
MOSI  (via drill 0.35)
  Top 0.127: IC2.31 14.1,11.64 14.1,11.66 14.63,12.2 v14.63,12.25 | v15.32,12.82 15.56,13.06 15.56,13.76 15.81,14.01 17.85,14.01 v19.68,12.18 | v20.48,21.8 20.48,21.66 20.37,21.55 17.56,21.55 17.29,21.29 17.29,20.66 17.15,20.51 17.15,15.86 17.93,15.08 18.23,15.08 19.14,14.17 22.15,14.17 v22.17,14.19 | v23.05,14.25 23.96,13.34 v23.96,12.56 | v22.85,8.11 23.23,7.72 23.61,7.72 24.01,8.12 v24.01,10.17 v24,10.17
  Bottom 0.127: 10.72,30.46 D3.2 | R6.2 4.44,24.7 4.5,24.7 4.83,25.04 4.83,26.84 5.99,28 7.25,28 IC4.5 7.42,29.52 7.33,29.61 7.33,31.47 8.08,32.22 8.96,32.22 10.72,30.46 | v15.32,12.82 14.84,12.35 14.73,12.35 v14.63,12.25 | v19.68,12.18 19.8,12.18 20.43,11.55 J3.P3 21.78,11.55 22.85,10.48 v22.85,8.11 | v20.48,21.8 20.48,22.81 20.47,22.82 20.47,23.18 20.8,23.51 U$5.10 20.8,25.42 18.73,27.5 18.73,28.18 20.63,30.08 20.63,31.1 19.12,32.61 19.12,34.17 18.86,34.43 16.49,34.43 14.82,32.76 13.02,32.76 10.72,30.46 | v22.17,14.19 22.23,14.25 v23.05,14.25 | v24,10.17 23.96,10.21 v23.96,12.56
N$1  (via drill 0.35)
  Top 0.127: v4.77,16.67 4.77,16.09 | v13.57,22.47 13.57,23.08 v13.87,23.38 | v12.61,29.89 12.45,29.89 11.65,29.09 IC6.1
  Top 0.13: 4.77,16.09 C1.2
  Bottom 0.127: v13.57,22.47 13.81,22.23 13.81,20.82 13.86,20.76 13.86,19.61 13.65,19.39 10.81,19.39 8.87,17.45 8.33,17.45 7.43,18.34 6.44,18.34 v4.77,16.67 | v13.87,23.38 13.87,23.94 13.78,24.03 13.78,25.27 14.25,25.74 14.66,25.74 18.01,29.08 18.01,32.74 17.6,33.15 16.72,33.15 16.47,32.9 16.47,30.64 15.72,29.89 v12.61,29.89
N$2
  Bottom 0.127: R12.2 23.33,22.19 R11.1 20.91,21.2 20.91,20.93 20.53,20.55 Q1.1
N$3  (via drill 0.3)
  Top 0.127: v13.36,4.9 15.34,4.9 16.68,6.24
  Top 0.13: R1-USB.2 11.8,4.6 v12.08,4.9 | 16.68,6.24 16.67,6.81 J2.A5
  Bottom 0.13: v13.36,4.9 v12.08,4.9
N$4  (via drill 0.3)
  Top 0.13: D1.1 2.07,16.17 v2.05,16.19 | v0.6,16.92 0.67,21.15 C1-BAT1.1 2,24.44 IC1.3 3.9,25.85 5.29,24.46 6.18,24.46 6.43,24.7 6.43,25.05 5.8,25.68 IC1.1 6.22,26.76 6.22,26.85 6.64,27.28 v6.76,27.28 | T1.2 19.21,35.01 15.67,35.01 13.99,33.33 13.99,31.29 13.7,31 13.33,31 13.12,31.21 11.81,31.21 v9.4,28.8 v9.38,28.8
  Bottom 0.13: v2.05,16.19 1.34,16.19 v0.6,16.92 | v9.38,28.8 9.38,27.9 8.74,27.25 7.01,27.25 6.99,27.28 v6.76,27.28
N$5
  Top 0.13: R2-BAT.2 6.8,17.65 U1.5
N$6
  Top 0.127: CHG_LED.C 2.8,19.59 3.7,18.69 R1-BAT.1
N$7  (via drill 0.3)
  Top 0.127: R1-BAT.2 7.1,18.68 v7.26,18.84 | U1.1 9.46,18.17 v8.99,18.64
  Bottom 0.127: v7.26,18.84 7.82,18.84 8.02,18.64 v8.99,18.64
N$8
  Top 0.13: R6-ESP1.1 23.1,33.62 SJ1.1
N$9
  Top 0.13: R7-ESP1.1 24.08,30.62 R6-ESP1.2 23.1,28.94 SJ2.2
N$10
  pour Top: 0.2,18.02 arc-90 17.98,36.07 arc-62 33.94,26.57 27.6,26.57 27.6,18.15 27.6,18.15 27.6,18.15 27.6,9.72 34.1,9.72 arc-63 18.22,0.04 arc-90
N$14
  Top 0.13: J2.B5 19.99,6.81 19.99,6.05 21.7,4.33 R2-USB.1
PIN_LED  (via drill 0.35)
  Top 0.127: v14.35,13.77 13.64,13.77 13.36,13.48 13.36,12.61 12.98,12.23 IC2.30
  Bottom 0.127: R11.2 18.94,17.93 16.44,17.93 16.19,17.67 16.19,17.24 16.44,16.99 16.44,15.62 14.58,13.77 v14.35,13.77
PPG_INT  (via drill 0.35)
  Top 0.127: v16.61,10.15 17.06,10.59 17.35,10.59 17.43,10.68 17.43,10.73 IC2.36
  Bottom 0.127: TP8.TP 10.26,11.76 10.52,11.49 11.05,11.49 11.16,11.38 11.16,9.56 11.89,8.83 15.29,8.83 v16.61,10.15
RESET  (via drill 0.35)
  Top 0.127: U$3.1 | U$3.1 27.29,6.04 | U$3.1' 28.28,8.8 28.27,8.81 | C5.1 25.94,7.9 25.41,8.43 25.41,8.44 24.95,8.44 v24.42,7.91
  Top 0.13: 27.29,6.04 C5.1 26.84,7.39 28.26,8.82 R1-ESP.1 | 28.27,8.81 R1-ESP.1 | R1-ESP.1 27.94,8.91 27.3,8.27 26.14,8.27 26.13,8.25 25.54,8.84 IC2.45
  Bottom 0.127: TP9.TP 10.36,5.01 11.47,3.91 22.02,3.91 24.41,6.3 v24.41,7.89 v24.42,7.91
RX  (via drill 0.35)
  Top 0.127: IC2.40 20.83,10.73 20.83,10.71 20.04,9.91 18.91,9.91 18.67,10.15 v17.24,10.15
  Bottom 0.127: TP11.TP 9.48,9.52 9.83,9.17 11.19,9.17 11.78,8.57 15.66,8.57 v17.24,10.15
SCK  (via drill 0.3, 0.35)
  Top 0.127: IC2.32 14.49,10.39 v14.71,10.17 | v17,12.07 17,12.01 16.65,11.66 16.65,10.75 16.49,10.59 16.43,10.59 v16.01,10.18 | v18.67,26.93 18.69,26.95 18.69,27.95 18.82,28.08 v19.62,28.08 | v18.68,33.99 18.98,33.99 20.04,33.99 20.15,33.88 20.15,32.97 v20.82,32.31 | v24.68,20.16 24.47,20.37 24.47,21.08 23.11,22.44 21.75,22.44 20.47,21.17 v20.47,21.11
  Bottom 0.127: v17,12.07 18.23,12.07 19.21,13.05 19.46,13.05 19.66,13.25 20.27,13.25 J3.P5 21.98,13.75 21.98,13.74 23.4,13.74 25.56,15.91 25.56,18.46 24.68,19.34 v24.68,20.16 | D4.2 8.3,29.82 8.3,29.7 8.69,29.31 IC4.6 8.69,28.77 9.28,29.36 10.05,29.36 10.41,29 11.08,29 13,30.92 13,31.55 13.95,32.51 14.92,32.51 16.59,34.17 17.43,34.17 17.61,33.99 v18.68,33.99 | v18.67,26.93 20.1,25.5 U$5.9 19.92,24.37 19.92,21.33 20.08,21.18 20.41,21.18 v20.47,21.11 | v20.82,32.31 24.25,32.31 R5.2 22.55,31.28 19.62,28.34 v19.62,28.08 | v14.71,10.17 v16,10.17 v16.01,10.18
SCL  (via drill 0.3, 0.35)
  Top 0.127: v13.91,26.84 13.39,26.84 12.83,27.39 12.42,27.39 12.31,27.5 12.31,28.12 IC6.2 | IC2.13 15.48,25.33 15.48,26.54 v15.16,26.87 | v8.8,31.73 10.22,31.73 10.44,31.95 10.44,32.59 11.42,33.57 11.45,33.57 11.7,33.83 11.7,34.22 12.19,34.7 12.31,34.74 v13.41,34.74 | v15.78,31.03 16.07,30.74 IC3.8 | v14.52,32.06 | v14.52,33.24 v14.52,32.06 | v14.52,32.06
  Top 0.13: IC6.2 12.31,28.44 12.31,29.31 12.43,29.44 14.55,29.44 15.39,30.27 IC3.8
  Bottom 0.127: v13.91,26.84 14.03,26.9 15.13,26.9 v15.16,26.87 | TP6.TP 2.91,20.3 3.18,20.58 3.18,21.42 3.64,21.88 3.64,22.33 5.09,23.77 5.09,26.32 6.51,27.74 6.88,27.74 7.11,27.51 7.72,27.51 7.83,27.62 7.83,29.46 7.6,29.7 7.6,30.56 7.64,30.6 7.64,30.92 7.59,30.97 7.59,31.36 7.95,31.73 v8.8,31.73 | v13.41,34.74 14.52,33.63 v14.52,33.24 | v15.78,31.03 15.58,31.23 15.36,31.23 v14.52,32.06
SDA  (via drill 0.35)
  Top 0.127: v15.42,28.4 15.42,28.76 15,29.18
  Top 0.13: IC3.9 16.49,30.59 16.6,30.48 16.6,30.07 16.15,29.62 15.44,29.62 15,29.18 13.88,29.18 | IC6.3 12.81,28.44 12.81,29.06 12.92,29.18 13.88,29.18 | IC2.12 15.74,25.64 15.74,26.86 15.65,26.96 15.65,27.4 13.88,29.18
  Bottom 0.127: TP7.TP 4.42,17.19 4.42,19.73 6.68,21.99 6.68,22.8 5.59,23.89 5.59,25.05 6.85,26.31 9.81,26.31 10.7,27.2 11.34,27.2 11.55,26.99 11.55,26.58 11.68,26.44 11.8,26.33 12.21,26.33 12.69,26.81 12.69,27.03 13.49,27.83 14.84,27.83 v15.42,28.4
SS
  Bottom 0.127: R4.2 25.71,23.77 D5.2
SS_FLASH  (via drill 0.35)
  Top 0.127: v11.5,21.42 11.56,21.42 12.11,21.98 12.13,21.98 IC2.18
  Bottom 0.127: v11.5,21.42 11.23,21.15 IC4.1
SS_SD  (via drill 0.3)
  Top 0.127: IC2.7 20.9,24.73 20.9,24.71 21.01,24.59 21.47,24.59 22.96,23.1 22.96,23.03 v25.65,20.33 | v25.71,18.91 23.54,16.73 23.54,15.36 22.61,14.43 22.61,14.06 23.36,13.31 23.36,11.97 23.17,11.77 22.71,11.77 22.6,11.66 22.6,10.77 22.12,10.3 v22.1,10.3
  Bottom 0.127: v22.1,10.3 v22.09,10.3 20.52,10.3 J3.P2 | v25.71,18.91 25.71,20.28 v25.65,20.33
SS_TFT  (via drill 0.35)
  Top 0.127: IC2.21 12.8,20.09 13.17,20.09 16.07,22.98 v19.02,22.98
  Bottom 0.127: v19.02,22.98 19.4,23.37 U$5.8
TFT_DC  (via drill 0.35)
  Top 0.127: IC2.22 13.05,19.49 13.07,19.49 13.18,19.61 13.18,19.62 13.96,20.4 14.3,20.4 16.27,22.38 v16.27,22.5
  Bottom 0.127: U$5.7 18.37,24.22 18.37,23.47 18.26,23.36 17.46,23.36 17.03,22.94 16.83,22.94 16.6,22.7 16.48,22.7 v16.27,22.5
TX  (via drill 0.35)
  Top 0.127: IC2.39 20.44,11.77 21.38,12.71 v22.24,12.71 | v6.62,8.41 7.03,8.41 8.88,6.56 9.01,6.56 v9.2,6.37
  Bottom 0.127: TP12.TP 5.56,7.35 v6.62,8.41 | v9.2,6.37 9.36,6.37 11.49,4.24 20.35,4.24 23.29,7.19 23.29,11.67 v22.24,12.71
VBAT  (via drill 0.35)
  Top 0.3: C2-BAT.1 21.35,32.39 21.35,33.22 21.11,33.45 SJ1.2 20.68,34.52 18.46,34.52 18.29,34.35 T1.3 16.99,33.94 16.28,33.94 15.34,33 15.34,32.14 13.86,30.66 13.19,30.66 12.98,30.87 12.15,30.87 10.15,28.87 10.15,24.8 9.74,24.39 7.2,24.39 6.44,23.63 6.44,23.58 6.37,23.51 6.37,22.94 6.77,22.54 6.77,21.88 7.07,21.58 7.49,21.58 7.54,21.64 8.55,21.64 9.45,20.74 9.45,20.52 U1.3 10.3,19.67 10.7,19.67 11.13,19.24 v11.13,18.95 | v11.65,15.49 11.65,15.17 11.66,15.16 11.66,11.34 11.42,11.1 11.42,9.17 11.87,8.72 11.87,8.08 11.73,7.93 11.66,7.93 11.34,7.62 11.34,7.41 11.16,7.23 10.93,7.23 10.73,7.03 10.35,7.03 10.31,6.98 9.6,6.98 9.51,6.9 9.03,6.9 8.5,7.42 8.5,11.66 v7.03,13.14 | v14.3,18.59 14.54,18.35 14.54,17.98 13.8,17.24 13.8,16.14 v13.56,15.9
  Bottom 0.3: TP5.TP 6.56,13.12 7.01,13.12 v7.03,13.14 | v11.65,15.49 12.1,15.93 13.52,15.93 v13.56,15.9 | v11.13,18.95 11.13,18.88 11.29,18.72 14.17,18.72 v14.3,18.59
VBUS  (via drill 0.35)
  Top 0.3: CHG_LED.A 1.16,19.73 C4-USB.1 1.2,18.72 R1-PWRUSB.2 D1.2 1.21,14.63 C5-USB.1 1.67,13.17 C1-BAT.1 4.59,12.11 PFMF.050.1.2 5.54,13.89 6.57,14.91 6.91,14.91 D6.5 7.65,15.66 8,15.66 8.16,15.82 8.16,16.65 8.03,16.78 8.03,17.63 8.18,17.78 8.18,18.81 7.57,19.42 U1.4 7.75,20.07 v8.08,20.4 | T1.1 19.22,33.11 17.53,33.11 v17.13,32.71
  Bottom 0.3: v8.08,20.4 8.08,20.86 9.43,22.2 11.54,22.2 12.03,22.69 12.03,25.67 13.81,27.45 15.22,27.45 17.12,29.35 17.12,32.7 v17.13,32.71
VIBE_OUT+  (via drill 0.35)
  Top 0.127: IC6.9 12.31,32.52 12.31,31.9 12.75,31.46 13.23,31.46 13.25,31.44 v13.51,31.44 | v19.91,32.5 19.89,32.51 18.64,32.51 v18.57,32.58 | v22.52,22.92 21.48,22.92 21.47,22.93 20.79,22.25 17.89,22.25 16.9,21.25 16.9,20.14 v15.49,18.74
  Bottom 0.127: TP1.TP 7.2,16.89 8.67,16.89 9.48,17.7 14.38,17.7 15.42,18.74 v15.49,18.74 | v19.91,32.5 20.93,31.48 20.93,30.02 18.98,28.07 18.98,27.87 19.84,27.01 20.67,27.01 21.01,27.34 23.21,27.34 24.64,25.91 24.64,23.07 24.49,22.93 24.06,22.93 23.79,23.2 22.8,23.2 v22.52,22.92 | v13.51,31.44 13.87,31.09 14.51,31.09 15.14,30.46 15.83,30.46 16.22,30.85 16.22,33.14 16.61,33.53 17.58,33.53 18.53,32.58 v18.57,32.58
VIBE_OUT-  (via drill 0.35)
  Top 0.127: v18.98,15.35 22.05,15.35 v22.21,15.52 | v14.51,34.74 13.15,33.38 IC6.7 | v15.42,17.48 16.57,17.48 v16.63,17.48
  Bottom 0.127: TP2.TP 5.65,15.8 7.94,15.8 9.58,17.45 14.51,17.45 14.54,17.48 v15.42,17.48 | v18.98,15.35 16.84,17.48 v16.63,17.48 | v22.21,15.52 22.7,16.01 22.7,16.69 22.16,17.23 22.16,18.27 24.64,20.75 25.82,20.75 25.86,20.72 26.11,20.72 26.5,21.11 26.5,27.79 26.47,27.82 26.85,28.2 28.34,28.2 28.68,28.54 28.68,30.81 25.32,34.16 25.19,34.24 23.75,34.74 v14.51,34.74
VUSB  (via drill 0.3, 0.35)
  Top 0.127: J2.B9 J2.A4
  Top 0.3: J2.B9 15.83,7.78 16.6,8.56 17.55,8.56 18.03,9.04 18.87,9.04 20.33,7.59 J2.B4 J2.A9 | J2.A4 15.45,7.05 15.45,8.65 14.16,9.95 13.57,9.95 v13.55,9.96 | PFMF.050.1.1 10.36,11.65 10.85,11.65 v11.15,11.96
  Bottom 0.3: v11.15,11.96 11.3,11.96 11.5,11.76 11.5,9.7 12.03,9.17 12.51,9.17 13.3,9.96 v13.55,9.96